# EAGLE board nano24rf-topo (EAGLE 7.6.0)
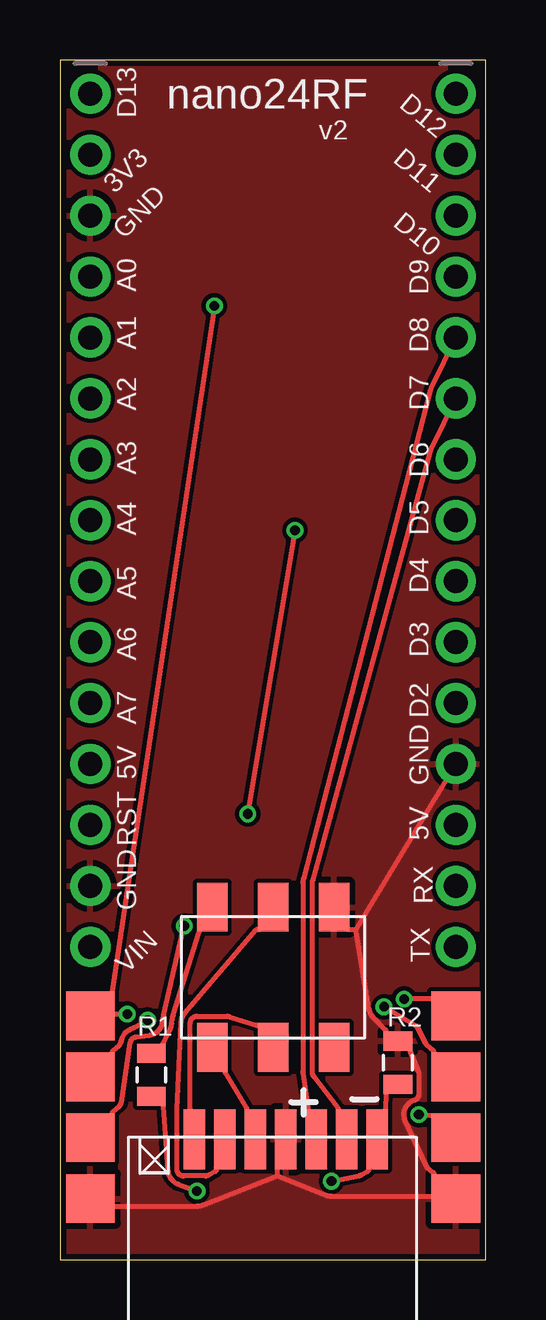
[diagram p0: board, top side]
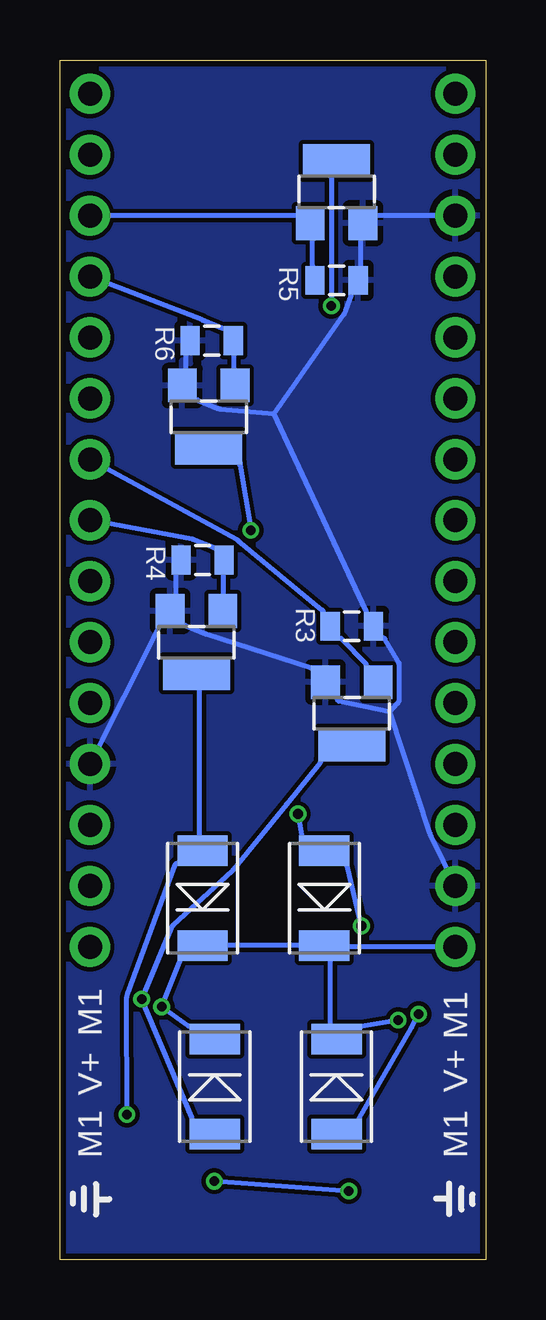
[diagram p1: board, bottom side, seen from below]

Size 17.76 x 50 mm. Coordinates in mm from the lower left corner, seen from the top.
Outline: 0,0 17.76,0 17.76,50 0,50 0,0
Copper layers 1+16: TOP 0.035mm / dielectric 0.15mm / BOTTOM 0.035mm
Design rules "default": minimum track width 8mil, minimum drill 0.6mm, track to track 7mil, track to pad 8mil, pad to pad 8mil, via to via 8mil, smd to smd 8mil, copper to edge 10mil, drill to drill 8mil, minimum pad ring 0.1mm, minimum via ring 0.1mm, stop-mask expansion 4mil, vias tented up to drill 0mil, thermal gap 10mil
Net classes: 0 default: width 0.203 mm, clearance 0.178 mm

## Footprints (pad centres in the part's own frame; a part is rotated, then mirrored left to right if it is on the bottom)
DO-214AC = smd 1.27 x 2.1: 1 -1.98,0; 2 1.98,0
1X15_ROUND_70 = drill 1 pad 1.676: 1 -17.78,0; 2 -15.24,0; 3 -12.7,0; 4 -10.16,0; 5 -7.62,0; 6 -5.08,0; 7 -2.54,0; 8 0,0; 9 2.54,0; 10 5.08,0; 11 7.62,0; 12 10.16,0; 13 12.7,0; 14 15.24,0; 15 17.78,0
2X03_SMT = smd 1.27 x 2.032: 1 -2.54,-2.921; 2 -2.54,2.921; 3 0,-2.921; 4 0,2.921; 5 2.54,-2.921; 6 2.54,2.921
SOT23-W = smd 1.2 x 1.4: 1 -1.1,-1.3; 2 1.1,-1.3 | smd 2.8 x 1.4: 3 0,1.3
0805 = smd 0.8 x 1.2: 1 -0.9,0; 2 0.9,0
FATPAD4 = smd 2.032 x 2.032: P$1 -3.81,0; P$2 -1.27,0; P$3 1.27,0; P$4 3.81,0
SMD1,27-2,54 = smd 0.9 x 2.5: 1 1.63,0.1; 2 2.9,0.1; 3 4.17,0.1; 4 5.44,0.1; 5 6.71,0.1; 6 7.98,0.1; 7 9.25,0.1

## Placement (x,y rotation side)
D1  [DO-214AC]  11.3,7.21 270 bottom
D2  [DO-214AC]  11.81,15.06 90 bottom
D3  [DO-214AC]  6.22,7.21 270 bottom
D4  [DO-214AC]  6.73,15.06 90 bottom
JP1  [1X15_ROUND_70]  1.27,30.81 270 top
JP2  [1X15_ROUND_70]  16.51,30.81 270 top
JP3  [2X03_SMT]  8.89,11.76 0 top
Q1  [SOT23-W]  5.59,22.77 180 bottom
Q2  [SOT23-W]  12.06,25.73 180 bottom
Q3  [SOT23-W]  6.22,44.5 0 bottom
Q4  [SOT23-W]  11.56,35.13 180 bottom
R1  [0805]  3.81,7.7 270 top
R2  [0805]  14.1,8.21 270 top
R3  [0805]  5.59,26.4 180 bottom
R4  [0805]  11.81,29.16 0 bottom
R5  [0805]  6.22,40.81 180 bottom
R6  [0805]  11.43,38.31 0 bottom
U$6  FATPAD4  [FATPAD4]  1.27,6.35 270 top
U$7  [SMD1,27-2,54]  14.86,5.11 180 top
U$8  FATPAD4  [FATPAD4]  16.51,6.35 270 top

## Library data of the parts
D1-D4 = dp_devices
JP1 JP2 = microbuilder
JP3 U$6-U$8 = nano24rf
Q1-Q4 = adafruit
R1-R6 = ATTAMI-V0.00

## Nets
3V3: JP1.2
5V: JP3.2 R1.1
CE: JP2.6 U$7.2
CSN: JP2.5 U$7.3
D3: JP2.10
D5: JP2.8 Q2.1 R4.2
D6: JP2.7 Q1.1 R3.2
D9: JP2.4 Q4.1 R6.2
D10: JP2.3 Q3.1 R5.2
FET01: D1.2 Q1.3 U$8.P$1
FET02: D2.2 Q2.3 U$8.P$3
FET03: D3.2 Q3.3 U$6.P$1
FET04: D4.2 Q4.3 U$6.P$3
GND: JP1.3 JP1.14 JP2.12 JP3.6 Q1.2 Q2.2 Q3.2 Q4.2 R2.1 R3.1 R4.1 R5.1 R6.1 U$6.P$4 U$7.4 U$8.P$4
MISO: JP3.1 U$7.5
MOSI: JP3.4 U$7.6
N$6: R1.2 R2.2 U$7.1
RST: JP3.5
SCK: JP3.3 U$7.7
SCL: JP1.9
SDA: JP1.8
VIN: D1.1 D2.1 D3.1 D4.1 JP1.15 U$6.P$2 U$8.P$2

## Tracks (layer width: path | path; a pad name or v marks a point on that pad's centre or on a via)
5V
  TOP 0.203: R1.1 4.31,8.9 4.31,9 arc-27 4.32,9.04 4.56,9.52 arc19 4.66,9.84 4.68,10 arc-10 4.72,10.17 5.81,13.64 arc17 5.82,13.67 5.82,13.77 JP3.2
CE
  TOP 0.203: JP2.6 15.51,33.84 arc11 15.43,33.65 10.53,15.77 arc15 10.52,15.7 10.52,7.83 arc37 10.57,7.66 11.59,6.32 arc-37 11.61,6.26 11.61,6.16 U$7.2
CSN
  TOP 0.203: JP2.5 15.51,36.38 arc12 15.43,36.17 10.15,15.87 arc15 10.13,15.7 10.13,7.83 arc8 10.14,7.74 10.34,6.28 arc-8 10.34,6.26 10.34,6.16 U$7.3
D5
  BOTTOM 0.203: Q2.1 10.94,27.63 10.94,27.73 10.94,28.56 10.94,28.66 R4.2 11.21,29.66 11.31,29.66 arc22 11.35,29.67 12.2,30.02 arc-12 12.26,30.04 JP2.8
D6
  BOTTOM 0.203: Q1.1 4.99,24.66 4.99,24.77 arc-44 5.01,24.84 6.01,25.87 arc-46 6.09,25.9 6.19,25.9 R3.2 6.79,26.9 6.79,27 arc-50 6.82,27.08 10.33,29.98 arc-11 10.38,30.01 JP2.7
D9
  BOTTOM 0.203: Q4.1 10.49,37.03 10.49,37.13 10.49,37.71 10.49,37.81 R6.2 10.83,38.8 10.93,38.8 arc22 10.97,38.81 11.82,39.16 11.83,39.17 JP2.4
D10
  BOTTOM 0.203: R5.2 7.22,41.31 7.22,41.41 7.22,42.5 7.22,42.6 Q3.1 7.82,43.51 7.92,43.51 JP2.3
FET01  (via drill 0.4 pad 0.7)
  TOP 0.203: U$8.P$1 15.6,10.86 15.49,10.86 v14.35,10.86
  BOTTOM 0.203: D1.2 12.25,5.76 12.25,5.86 arc-23 12.26,5.9 v14.35,10.86 13.12,13.83 arc25 13.05,13.93 10.57,16.2 arc-8 10.54,16.23 8.32,18.97 6.91,20.7 arc-39 6.89,20.77 6.89,20.87 Q1.3
FET02  (via drill 0.4 pad 0.7)
  TOP 0.203: U$8.P$3 15.6,5.99 15.49,5.99 15.49,6 v14.97,6.04
  BOTTOM 0.203: v14.97,6.04 14.98,10.86 arc20 14.94,11.08 12.96,16.45 arc70 12.86,16.51 12.76,16.51 D2.2 11.94,17.58 11.94,17.68 11.94,23.73 11.94,23.84 Q2.3
FET03  (via drill 0.4 pad 0.7)
  TOP 0.203: v2.81,10.23 2.29,10.23 2.18,10.23 U$6.P$1 2.18,11.07 2.18,11.18 arc-8 2.19,11.19 v6.44,39.75
  BOTTOM 0.203: D3.2 5.28,5.76 5.28,5.86 arc30 5.26,5.91 3.11,9.66 arc-1 3.1,9.68 v2.81,10.23 | Q3.3 6.44,45.2 6.44,45.1 v6.44,39.75
FET04  (via drill 0.4 pad 0.7)
  TOP 0.203: v9.8,30.4 v7.83,18.57 | U$6.P$3 2.18,5.99 2.18,6.1 arc-49 2.22,6.17 2.47,6.39 arc40 2.56,6.56 2.94,9.04 arc-74 3.17,9.28 3.74,9.35 arc74 4.28,9.89 4.3,10.05 arc-5 4.33,10.18 v5.19,13.91
  BOTTOM 0.203: v7.83,18.57 7.68,17.7 arc10 7.68,17.68 7.68,17.58 D4.2 5.78,16.51 5.78,16.41 arc-13 5.78,16.39 v5.19,13.91 | Q4.3 10.26,33.23 10.26,33.13 arc-10 10.26,33.11 v9.8,30.4
GND
  TOP 0.203: JP3.6 11.96,13.77 12.06,13.77 12.34,13.76 | 12.34,13.76 12.89,10.43 arc35 13.07,10.09 13.57,9.58 arc-44 13.6,9.51 13.6,9.4 R2.1 14.6,8.81 14.6,8.71 arc22 14.6,8.67 14.96,7.81 arc-22 14.98,7.71 14.98,6.91 arc-72 14.78,6.64 14.77,6.64 arc97 14.4,5.77 15.24,3.95 arc24 15.31,3.85 15.56,3.63 arc-49 15.6,3.56 15.6,3.45 U$8.P$4 15.6,2.64 11.32,2.64 arc-22 11.09,2.68 9.07,3.48 | JP2.12 12.34,13.76 | U$6.P$4 2.18,2.22 5.71,2.22 arc21 5.94,2.26 9.07,3.48 | 9.07,3.48 9.07,3.86 U$7.4
  BOTTOM 0.203: JP1.3 4.62,43.51 Q3.2 5.22,42.6 5.22,41.31 R5.1 5.62,40.32 5.62,40.22 arc19 5.63,40.18 5.85,39.55 arc16 5.93,39.39 8.83,35.26 | JP1.14 2.27,17.62 arc8 2.33,17.77 3.99,22.83 | R6.1 12.49,37.81 12.49,37.03 Q4.2 12.16,35.83 12.06,35.83 arc22 12.02,35.83 11.16,35.47 arc-17 11.08,35.45 8.83,35.26 | 3.99,22.83 3.68,23.18 arc-42 3.61,23.36 3.61,24.77 arc-30 3.65,24.91 4.2,25.85 arc-60 4.29,25.9 4.39,25.9 R3.1 4.99,26.9 4.99,27 arc-25 5,27.04 8.83,35.26 | JP2.12 13.67,26.29 arc-27 13.66,26.33 13.66,26.43 Q2.2 | R4.1 12.94,28.66 12.94,27.63 Q2.2 | Q2.2 12.67,26.43 12.56,26.43 arc22 12.53,26.43 11.67,26.07 arc-5 11.65,26.07 7.32,24.67 arc-18 7.29,24.66 7.19,24.66 Q1.2 6.19,23.47 6.19,23.36 arc-78 6.11,23.27 3.99,22.83
  pour TOP: -0.25,50.62 0,0 17.78,-0.13 17.78,50.62
  pour BOTTOM: 0,50.5 0,-0.13 17.78,-0.13 17.78,50.5
MISO
  TOP 0.203: U$7.5 7.8,6.16 7.8,6.26 arc31 7.79,6.31 6.9,7.77 arc-31 6.88,7.83 6.88,7.93 JP3.1
MOSI
  TOP 0.203: U$7.6 6.53,3.86 6.53,3.76 arc-61 6.48,3.67 6.19,3.52 arc-29 6.06,3.48 5.16,3.48 arc-90 4.88,3.76 4.88,6.26 arc-3 4.88,6.27 5.05,9.89 arc-38 5.21,10.29 8.18,13.73 arc-49 8.26,13.77 8.36,13.77 JP3.4
N$6  (via drill 0.4 pad 0.7)
  TOP 0.203: v11.32,3.27 12.46,3.49 arc18 12.54,3.52 12.83,3.67 arc61 12.88,3.76 12.88,3.86 U$7.1 13.58,6.16 13.58,6.26 13.6,6.9 13.6,6.91 13.6,7.01 R2.2 | R1.2 4.31,6.5 4.31,6.4 4.31,6.39 4.5,3.71 arc66 4.93,3.14 v5.71,2.85
  BOTTOM 0.203: v5.71,2.85 v11.32,3.27
SCK
  TOP 0.203: U$7.7 5.43,6.16 5.43,6.26 5.43,9.86 arc-90 5.71,10.14 6.99,10.14 arc-17 7.07,10.12 8.22,9.76 arc17 8.26,9.76 8.36,9.76 JP3.3
VIN  (via drill 0.4 pad 0.7)
  TOP 0.203: U$6.P$2 2.18,8.53 2.18,8.64 arc-48 2.22,8.71 2.47,8.94 arc39 2.56,9.1 2.56,9.1 arc-57 2.94,9.6 3.06,9.65 arc4 3.11,9.68 v3.66,9.98 | U$8.P$2 15.6,8.53 15.6,8.64 arc49 15.56,8.71 15.31,8.93 arc-23 15.24,9.02 14.95,9.63 arc33 14.84,9.75 v13.52,10.53
  BOTTOM 0.203: D4.1 D2.1 12.76,12.55 12.76,12.45 arc22 12.77,12.41 v13.52,10.53 12.41,9.74 arc-36 12.35,9.72 12.25,9.72 D1.1 | JP1.15 5.78,13.03 D4.1 | v3.66,9.98 5.16,9.72 arc10 5.17,9.72 5.28,9.72 D3.1 6.48,9.72 6.48,12.55 D4.1

## Text on the board
tPlace: D13 | nano24RF | v2 | D12 | D11 | 3V3 | GND | D10 | A0 | D9 | A1 | D8 | A2 | D7 | A3 | D6 | A4 | D5 | A5 | D4 | A6 | D3 | D2 | A7 | 5V | GND | RST | 5V | GND | RX | VIN | TX
bNames: M1 | M1 | V+ | V+ | M1 | M1